# Altium PCB MCP4725.PcbDoc
Units mm, origin at the board's own origin, x right, y up, seen from the top; angles counter-clockwise.
Board outline 29.21 x 31.37 mm, 2 copper layers (Top Layer, Bottom Layer); 3 components, 6 nets, 16 pads, 9 vias.
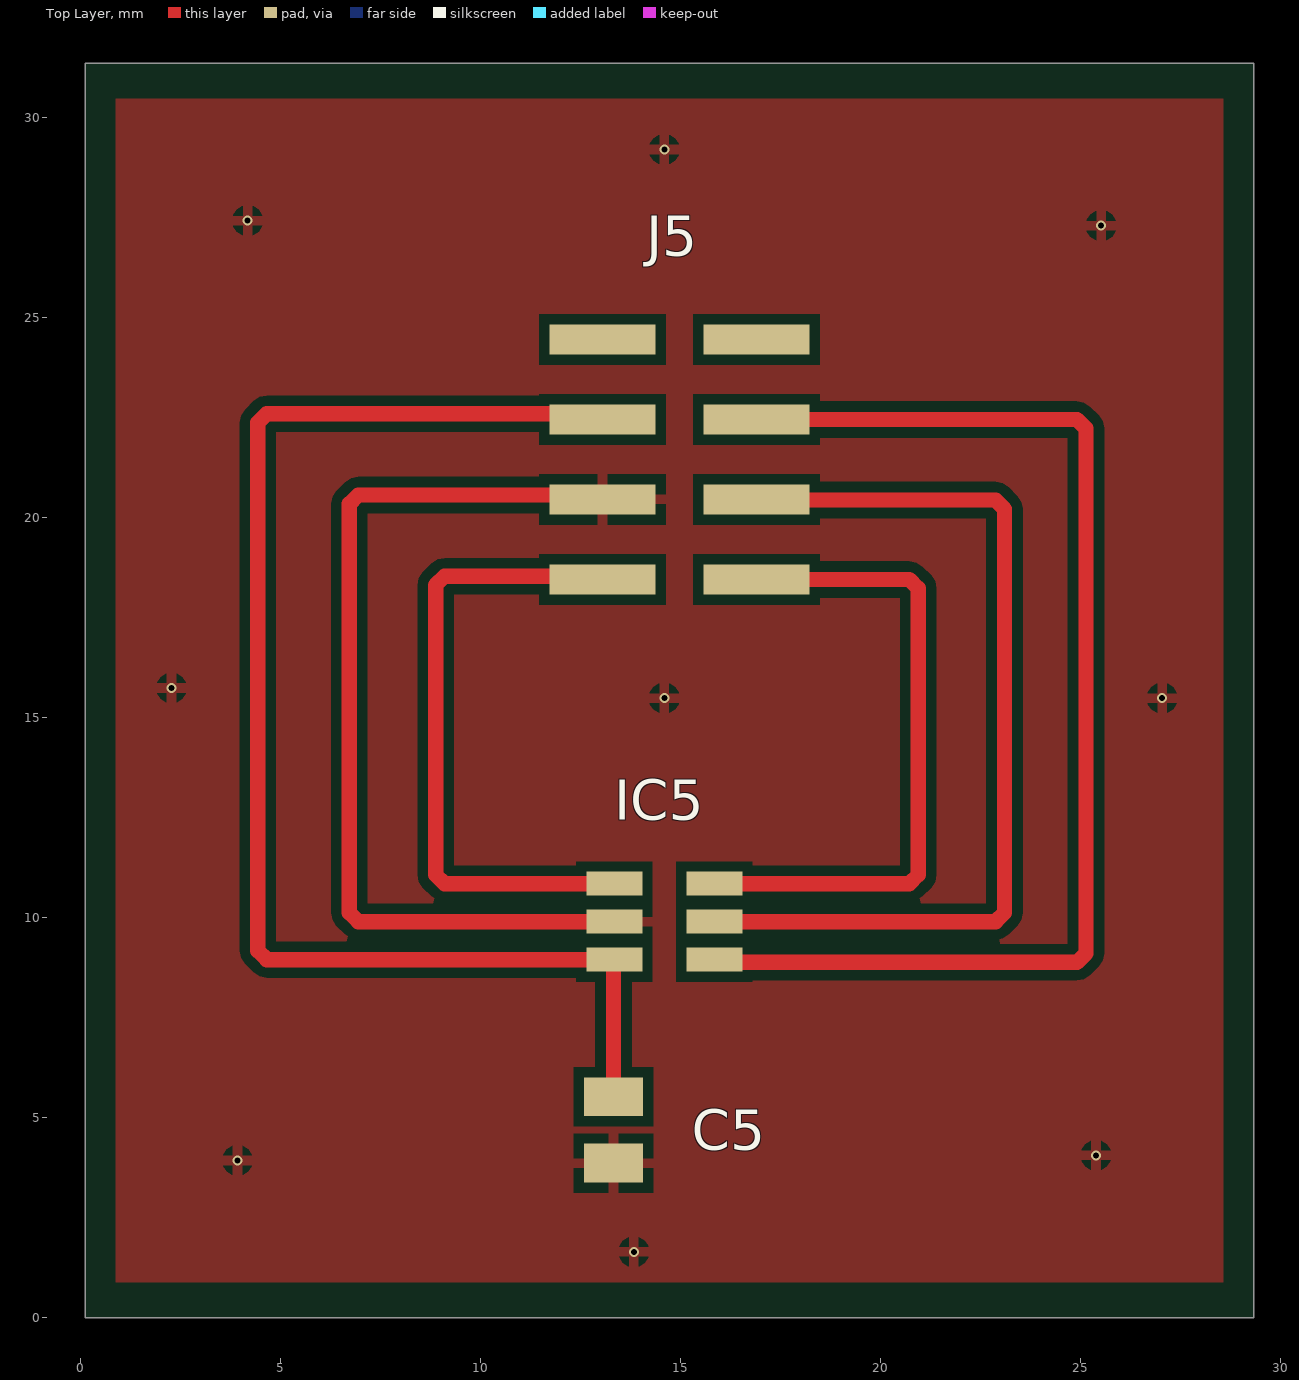
[diagram p0: Top Layer view]
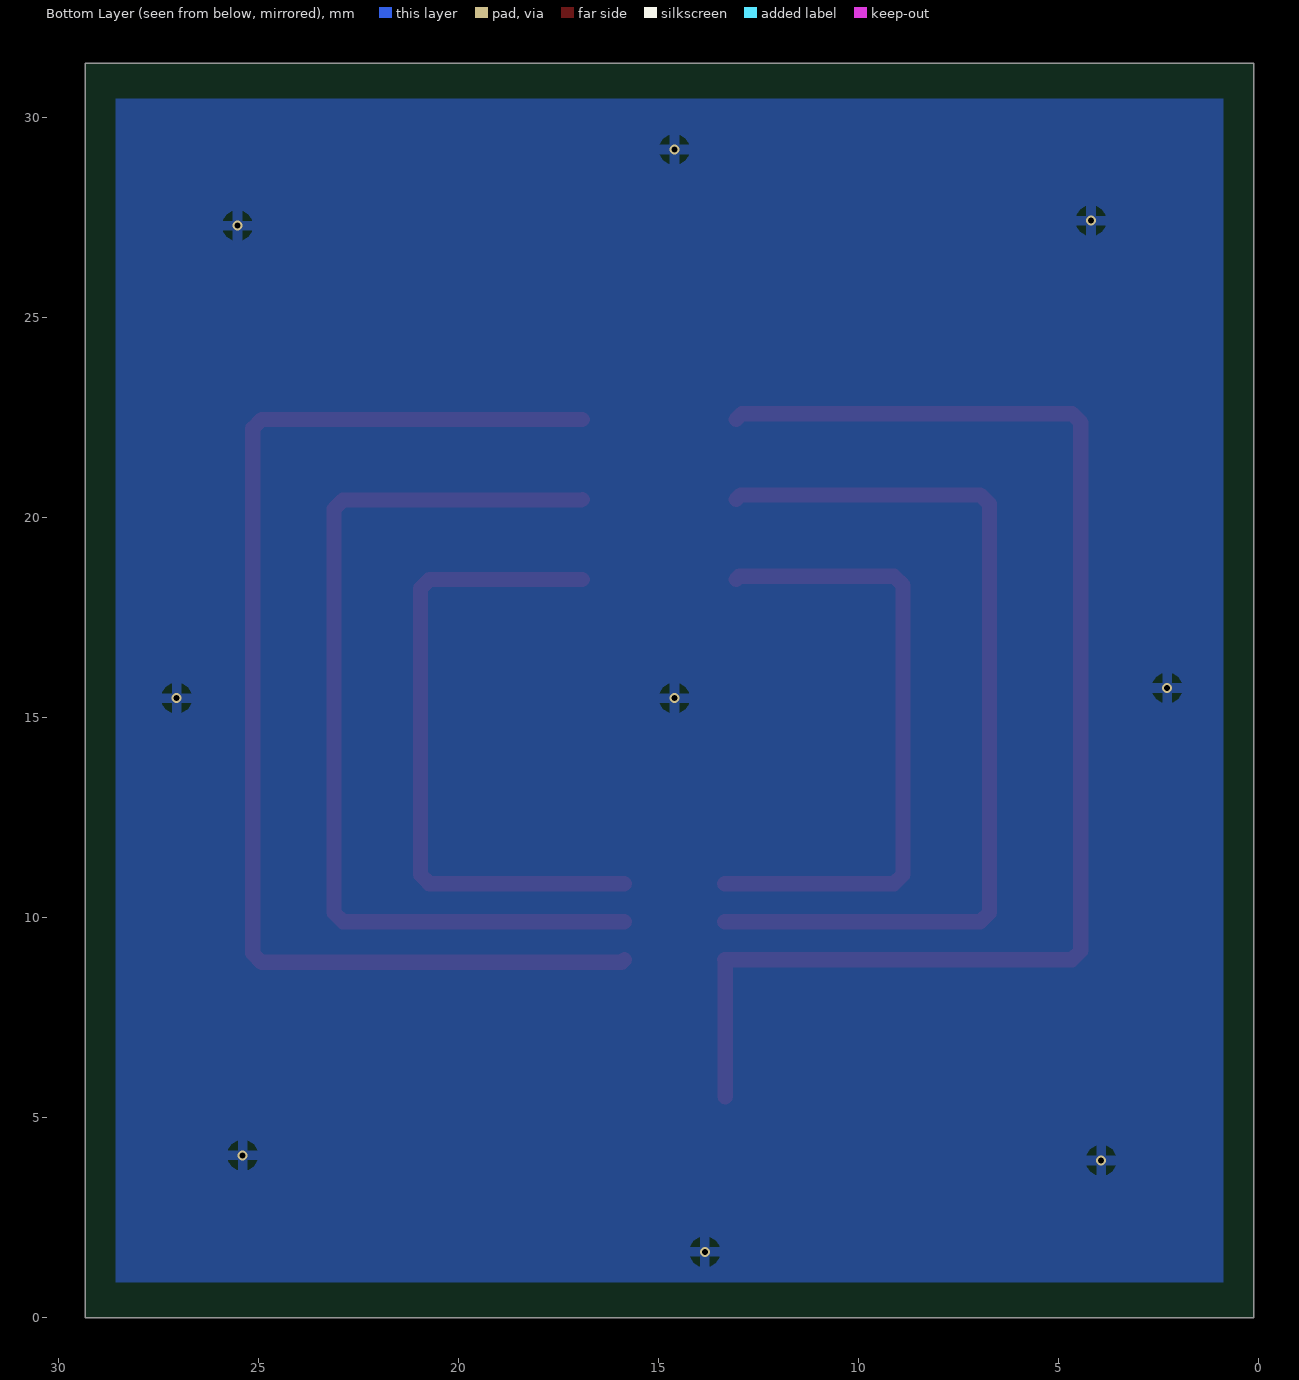
[diagram p1: Bottom Layer view, seen from below]
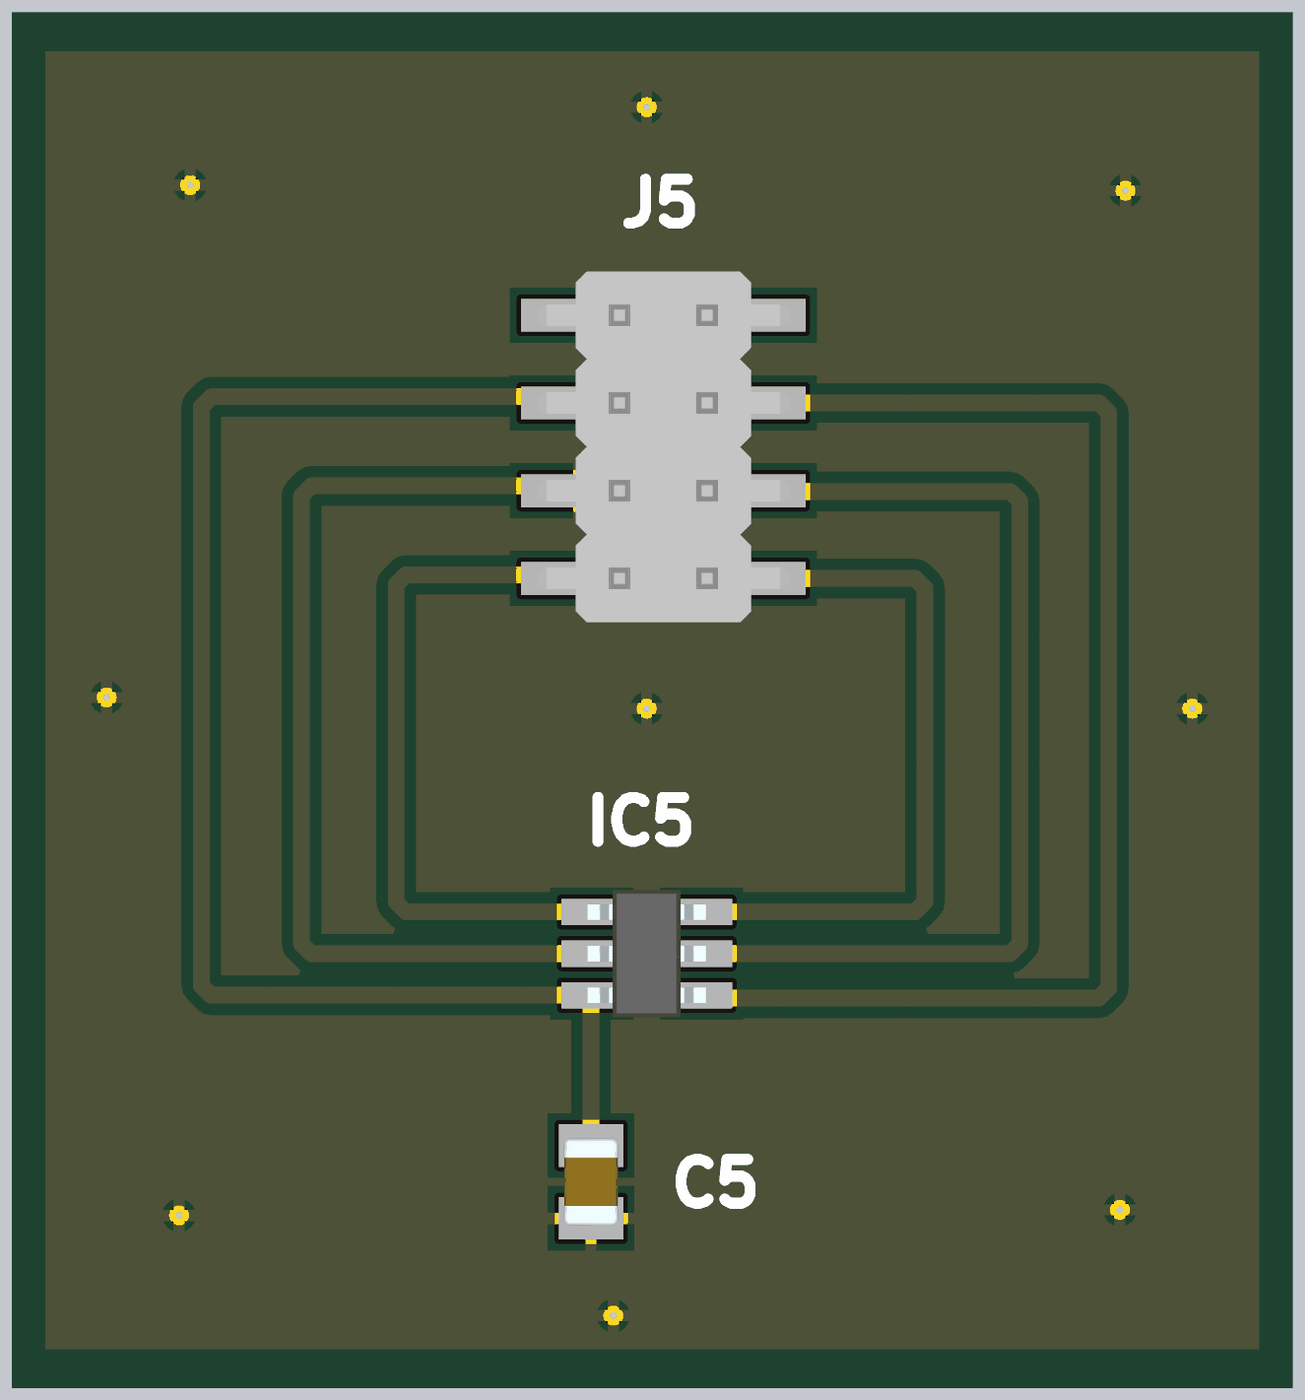
[diagram p2: 3D render of the assembled board from above, using the file's embedded part models]

## Layer stack, top to bottom
Top Solder: solder mask 0.0102, Solder Resist, Dk 3.5
Top Layer: signal copper 0.0356
Dielectric 1: dielectric 0.32, FR-4, Dk 4.8
Bottom Layer: signal copper 0.0356
Bottom Solder: solder mask 0.0102, Solder Resist, Dk 3.5

## Board outline
0.127,0 29.337,0 29.337,31.369 0.127,31.369

## Design rules (kind name [scope] priority, off if disabled: settings)
Clearance [All] p1: gap=0.254 ignorepadtopadclearanceinfootprint=FALSE except(0: Arc-Hole Track-Hole SMDPad-Hole THPad-Hole Via-Hole Fill-Hole Poly-Hole Region-Hole Text-Hole; 0.15: Arc-Arc Arc-Track Arc-SMDPad Track-Track Track-SMDPad SMDPad-SMDPad; 0.5: THPad-THPad)
MinimumSolderMaskSliver [All] p1: minsoldermaskwidth=0.1
PolygonConnect [All] p1: connectstyle=Relief reliefconductorwidth=0.254 reliefentries=4 polygonreliefangle="90 Angle" airgapwidth=0.254
RoutingLayers [All] p1: top layer_v5=TRUE bottom layer_v5=FALSE
RoutingVias [All] p1: holewidth=0.15 width=0.25 viastyle="Through Hole" minholewidth=0.15 minwidth=0.25 maxholewidth=0.2 maxwidth=0.3
SolderMaskExpansion [All] p1: expansion=0.102 istentingtop=FALSE
Width [All] p1: maxlimit=0.9 minlimit=0.15 preferedwidth=0.254 minimp=50.000000 maximp=50.000000 favimp=50.000000
28 further rules are at their usual default settings.

## Components (designator, comment, footprint, x,y, rotation, side; value= is the part's Value field where it differs from the comment)
C5 "GRM21BR71C105MA01K" CAPC2012X145N 13.335,4.699 r90 top
IC5 "MCP4725A0T-E_CH" SOT95P270X145-6N 14.605,9.906 r0 top
J5 "M22-5320405" HUSSP8W50P200_2X4_800X400X500P 14.986,21.463 r90 top

## Footprints (in the part's own frame and the unit in brackets; to place one, negate y for a bottom-side part, rotate by r counter-clockwise, add the part's x,y. Pads: shape width x height; smd on the part's side, far side on the other; paste and mask are expansions set on the pad)
CAPC2012X145N [mm]
  rect 0.97x1.47 smd: 1(-0.83,0) 2(0.83,0)
  body extent -1,-0.63 1,0.63, height 1.45
HUSSP8W50P200_2X4_800X400X500P [mm]
  rect 0.75x2.65 smd: 1(-3,-1.925) 2(-3,1.925) 3(-1,-1.925) 4(-1,1.925) 5(1,-1.925) 6(1,1.925) 7(3,-1.925) 8(3,1.925)
  body extent -4,-2.88 4,2.88, height 6
SOT95P270X145-6N [mm]
  rect 1.4x0.6 smd: 1(-1.25,0.95) 2(-1.25,0) 3(-1.25,-0.95) 4(1.25,-0.95) 5(1.25,0) 6(1.25,0.95)
  body extent -1.35,-1.45 1.35,1.45, height 1.45

## Part data
C5: "Capacitor", Manufacturer_Name="Murata Electronics", Mouser Part Number=81-GRM21R71C105MA01K, Datasheet Link=http://www.murata.com/~/media/webrenewal/support/library/catalog/products/capacitor/mlcc/c02e.pdf, Height=1.45mm, Manufacturer_Part_Number=GRM21BR71C105MA01K, Mouser Price/Stock=https://www.mouser.co.uk/ProductDetail/Murata-Electronics/GRM21BR71C105MA01K?qs=%252BOhj5xpo0CKX2ExPHNXi%252Bg%3D%3D
IC5: "Integrated Circuit", Arrow Part Number=MCP4725A0T-E/CH, Manufacturer_Name=Microchip, Mouser Part Number=579-MCP4725A0TECH, Arrow Price/Stock=https://www.arrow.com/en/products/mcp4725a0t-ech/microchip-technology?region=nac, Datasheet Link=http://ww1.microchip.com/downloads/en/DeviceDoc/22039d.pdf, Height=1.45mm, Manufacturer_Part_Number=MCP4725A0T-E/CH, Mouser Price/Stock=https://www.mouser.co.uk/ProductDetail/Microchip-Technology/MCP4725A0T-E-CH?qs=vkMqrgFpRajeQECZ3goc0A%3D%3D
J5: "Connector", Manufacturer_Name=Harwin, Mouser Part Number=855-M22-5320405, Datasheet Link=https://cdn.harwin.com/pdfs/M22-532.pdf, Manufacturer_Part_Number=M22-5320405, Mouser Price/Stock=https://www.mouser.co.uk/ProductDetail/Harwin/M22-5320405?qs=WS5Jv%252B%252Bx1qVxYYIoWES7kw%3D%3D

## Via types
v1: diameter 0.25, hole 0.15, Top Layer to Bottom Layer, 9 vias

## Nets (pads, with @x,y where several pads share a name; then routed paths per layer and width w, separated by ;. In a path a pad name is that pad's centre, name@x,y a point inside that pad or via, vN(x,y) a via of type N, cw(c..) or ccw(c..) an arc to the next point about the centre after c; other vN are vias at no path point)
A0: IC5.6 J5.1 | length 16.5
  Top Layer w0.381: IC5.6 20.732,10.856 20.955,11.079 20.955,18.24 20.732,18.463 J5.1
SCL: IC5.5 J5.3 | length 23.7
  Top Layer w0.381: IC5.5 22.891,9.906 23.114,10.129 23.114,20.224 22.891,20.447 16.927,20.447 J5.3
SDA: IC5.4 J5.5 | length 30.9
  Top Layer w0.381: IC5.4 15.921,8.89 24.923,8.89 25.146,9.113 25.146,22.24 24.923,22.463 J5.5
VDD: C5.2 IC5.3 J5.6 | length 34.4
  Top Layer w0.381: J5.6 12.918,22.606 4.668,22.606 4.445,22.383 4.445,9.179 4.668,8.956 IC5.3 13.335,8.936 C5.2
VOUT: IC5.1 J5.2 | length 16.1
  Top Layer w0.381: J5.2 12.982,18.542 9.113,18.542 8.89,18.319 8.89,11.079 9.113,10.856 IC5.1
VSS: C5.1 IC5.2 J5.4 | length 23.4
  Top Layer w0.381: J5.4 12.95,20.574 6.954,20.574 6.731,20.351 6.731,10.129 6.954,9.906 IC5.2
  other v1: 13.843,1.651 3.937,3.937 25.4,4.064 14.605,15.494 27.051,15.494 2.286,15.748 25.527,27.305 4.191,27.432 14.605,29.21
pads on no net: J5.7 J5.8

## Polygon pours and split planes (outlines as drawn)
VSS on Bottom Layer "NONET_L-01_P-001" (solid, pour order 0): 28.575,30.48 28.575,0.889 0.889,0.889 0.889,30.48
VSS on Top Layer "NONET_L-01_P-001" (solid, pour order 1): 0.889,30.48 28.575,30.48 28.575,0.889 0.889,0.889
no net on Bottom Solder "NONET_L-01_P-001" (solid): 1.524,2.794 3.556,2.794 3.556,1.143 1.524,1.143

## Silkscreen, mask and mechanical layers (free items; w line width, h text height)
Mechanical 1:
  lines w0.254: 0.762,30.861 28.956,30.861 28.956,0.508 0.508,0.508 0.508,30.861 1.016,30.861